# EAGLE board Sarvo (EAGLE 9.7.0)

Size 377.74 x 188.63 mm. Coordinates in mm from the lower left corner, seen from the top.
Outline: 0,0 377.74,0 377.74,188.63 0,188.63 0,0
Copper layers (1*16): Top 0.035mm / dielectric 1.5mm / Bottom 0.035mm
Design rules "default": minimum track width 6mil, minimum drill 0.35mm, track to track 6mil, track to pad 6mil, pad to pad 6mil, via to via 6mil, smd to smd 6mil, copper to edge 40mil, drill to drill 6mil, minimum pad ring 10mil, minimum via ring 8mil, stop-mask expansion 4mil, vias tented up to drill 0mil, thermal gap 10mil

## Footprints (pad centres in the part's own frame; a part is rotated, then mirrored left to right if it is on the bottom)
RESAD1016W63L850D250B = drill 0.83 pad 1.43: 1 -5.08,0; 2 5.08,0
HA-06-SM065 = drill 1 pad 1.676: 1 -2.54,-2.54; 2 0,2.54; 3 2.54,-2.54
SG90 = drill 1.016 long: 1 -2.54,0; 2 0,0; 3 2.54,0
ARDUINO-UNO-R3-SHIELD = drill 1.016 pad 1.88: 3.3V 24.13,-2.54; 5V 24.13,0; A0 24.13,12.7; A1 24.13,15.24; A2 24.13,17.78; A3 24.13,20.32; A4 24.13,22.86; A5 24.13,25.4; AREF -24.13,-13.97; D2 -24.13,20.32; D3 -24.13,17.78; D4 -24.13,15.24; D5 -24.13,12.7; D6 -24.13,10.16; D7 -24.13,7.62; D8 -24.13,3.81; D9 -24.13,1.27; D10 -24.13,-1.27; D11 -24.13,-3.81; D12 -24.13,-6.35; D13 -24.13,-8.89; GND@0 24.13,2.54; GND@1 24.13,5.08; GND@2 -24.13,-11.43; IOREF 24.13,-7.62; NC 24.13,-10.16; RES 24.13,-5.08; RX -24.13,25.4; SCL -24.13,-19.05; SDA -24.13,-16.51; TX -24.13,22.86; VIN 24.13,7.62
JHD-162A = drill 1.016 long: 1 -19.05,0; 2 -16.51,0; 3 -13.97,0; 4 -11.43,0; 5 -8.89,0; 6 -6.35,0; 7 -3.81,0; 8 -1.27,0; 9 1.27,0; 10 3.81,0; 11 6.35,0; 12 8.89,0; 13 11.43,0; 14 13.97,0; 15 16.51,0; 16 19.05,0

## Placement (x,y rotation side)
R1  220  [RESAD1016W63L850D250B]  282.9,179.66 270 top
RPOT1  250k  [HA-06-SM065]  242.26,154.26 0 top
SERVO1  SERVOSG90  [SG90]  35.3,164.4 0 top
U1  ARDUINO-UNO-R3-SHIELD  [ARDUINO-UNO-R3-SHIELD]  343.22,29.84 270 top
U2  ARDUINO-UNO-R3-SHIELD  [ARDUINO-UNO-R3-SHIELD]  47.88,83.58 270 top
U4  LCD-16X2JHD-162A  [JHD-162A]  263.85,131.53 0 top

## Library data of the parts
R1 RPOT1 SERVO1 U1 U2 U4 = Tinkercad

## Nets
U2_5V: SERVO1.2 U2.5V
U2_D8: SERVO1.3 U2.D8
U2_GND: SERVO1.1 U2.GND@0 U2.GND@1 U2.GND@2
U4_GND: RPOT1.3 U4.1 U4.5 U4.16
U4_LED+: R1.2 U4.15
U4_VCC: R1.1 RPOT1.1 U4.2
U4_VO: RPOT1.2 U4.3

## Tracks (layer width: path | path; a pad name or v marks a point on that pad's centre or on a via)
U2_5V  (1 unrouted)
U2_D8  (1 unrouted)
U2_GND  (3 unrouted)
U4_GND  (3 unrouted)
U4_LED+  (1 unrouted)
U4_VCC  (2 unrouted)
U4_VO  (1 unrouted)